# Altium PCB MONOPLACA FINAL.PcbDoc
Units mm, origin at the board's own origin, x right, y up, seen from the top; angles counter-clockwise.
Board outline 200 x 90 mm, 2 copper layers (Top Layer, Bottom Layer); 47 components, 35 nets, 158 pads, 7 vias.
Unrouted connection lines stored in the file: 19.
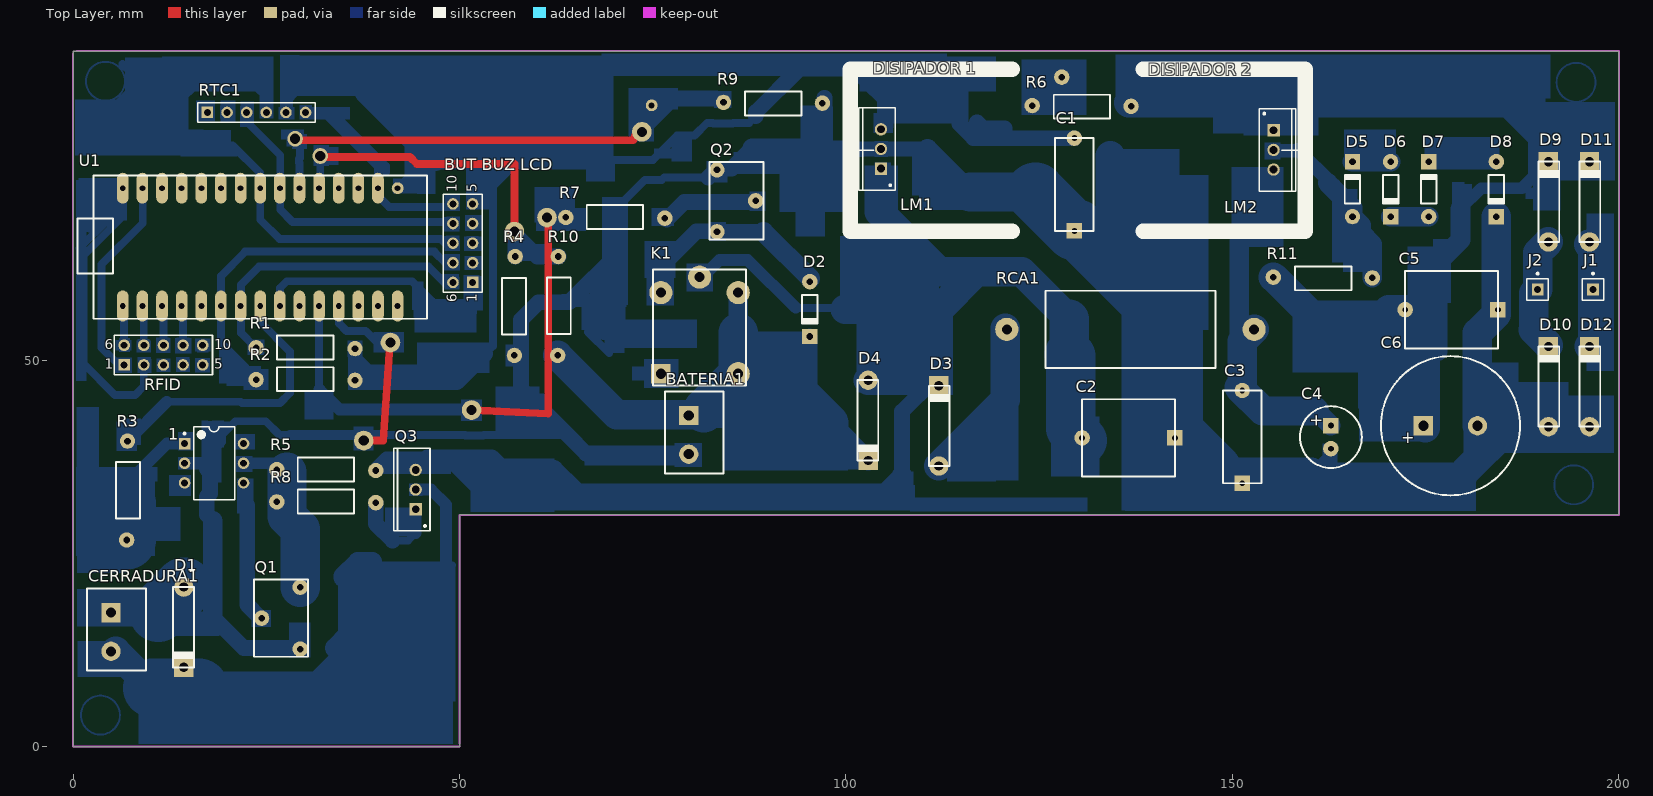
[diagram p0: Top Layer view]
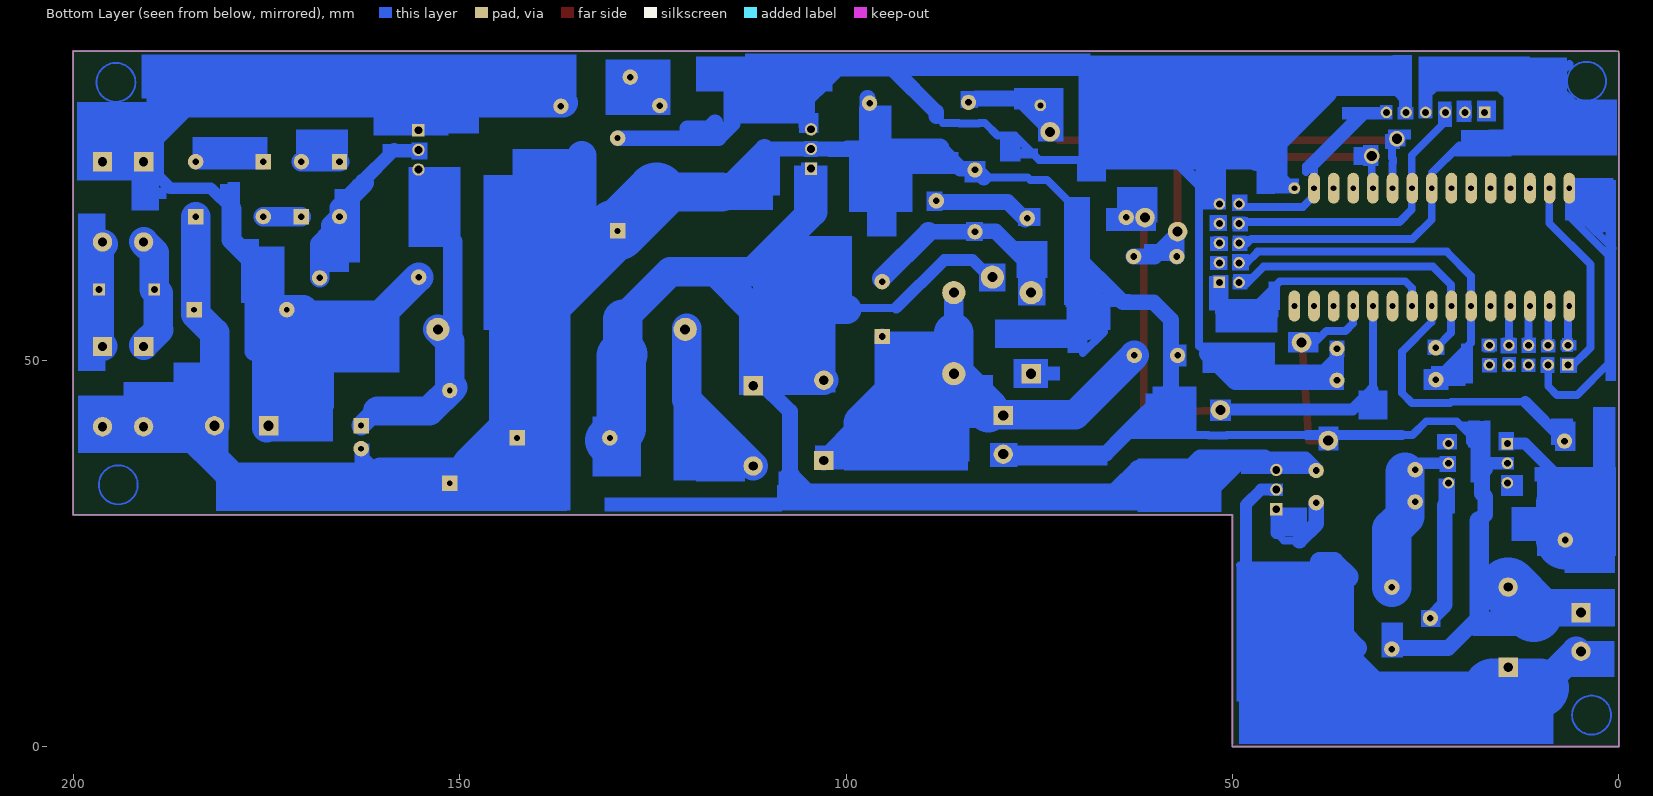
[diagram p1: Bottom Layer view, seen from below]
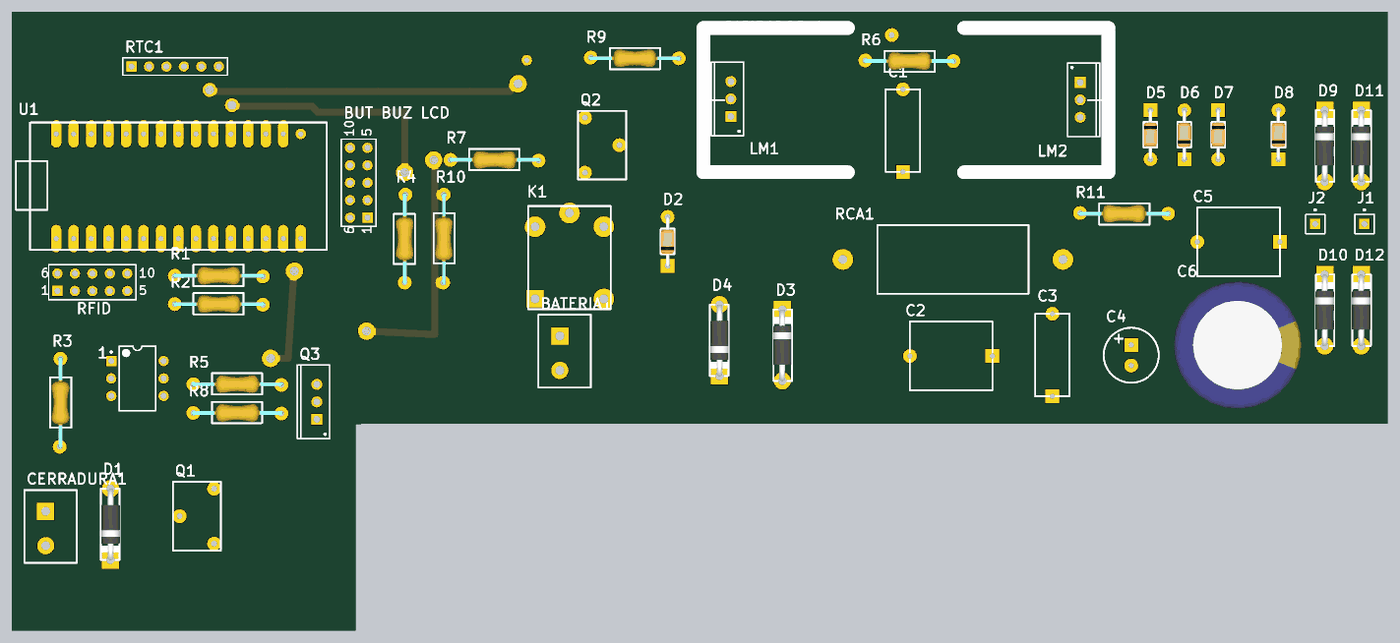
[diagram p2: 3D render of the assembled board from above, using the file's embedded part models]

## Layer stack, top to bottom
Top Solder: solder mask 0.0102, Solder Resist, Dk 3.5
Top Layer: signal copper 0.0356
Dielectric 1: dielectric 0.32, FR-4, Dk 4.8
Bottom Layer: signal copper 0.0356
Bottom Solder: solder mask 0.0102, Solder Resist, Dk 3.5

## Board outline
0,0 50,0 50,30 200,30 200,90 0,90

## Design rules (kind name [scope] priority, off if disabled: settings)
Clearance [All         - WithinRoom('Room1') vs All              - WithinRoom('Room1')] p1: gap=1.524 ignorepadtopadclearanceinfootprint=FALSE except(1.016: Arc-Arc Arc-Track Track-Track)
PolygonConnect [All] p1: connectstyle=Relief reliefconductorwidth=0.254 reliefentries=4 polygonreliefangle="90 Angle" airgapwidth=0.254
RoomDefinition Room1 [InComponentClass('Components Class -1')] p1: confinementstyle=ConfineIn formatcopy=TRUE lockcomponents=FALSE outline 0.61,89.611 64.541,89.611 64.541,41.732 0.61,41.732
RoutingVias [All] p1: holewidth=0.711 width=1.27 viastyle="Through Hole" minholewidth=0.711 minwidth=1.27 maxholewidth=0.711 maxwidth=1.27
SolderMaskExpansion [All] p1: expansion=0.102
Width [All] p1: maxlimit=12.7 minlimit=1.016 preferedwidth=1.016
30 further rules are at their usual default settings.

## Components (designator, comment, footprint, x,y, rotation, side; value= is the part's Value field where it differs from the comment)
1 "4N25" DIP-6 18.237,36.678 r0 top
BATERIA1 "Header 2" "Bornera 2 pin" 84.154,45.95 r270 top
"BUT BUZ LCD" "Header 5X2A" HDR2X5_CEN 51.689,60.071 r90 top
C1 "Cap" "CAP 5x12 mm" 129.54,66.74 r90 top value="0.1 uf"
C2 "Cap" "CAP 12x10 mm" 142.556,39.954 r180 top value="0.47 uf"
C3 "Cap" "CAP 5x12 mm" 151.271,34.087 r90 top value="0.1 uf"
C4 "Cap Pol1" "CAP POL 3 - 8 mm" 162.738,41.557 r90 top value="220 uf"
C5 "Cap" "CAP 12x10 mm" 184.353,56.54 r180 top value="0.47 uf"
C6 "Cap Pol1" "CAP POL 18x7 mm" 178.201,41.529 r180 top value="2200 uf"
CERRADURA1 "Header 2" "Bornera 2 pin" 9.402,20.444 r270 top
D1 "1N5819" DO-41 14.326,20.65 r270 top
D2 "IN4148" DO-35 95.326,60.173 r270 top
D3 "1N5819" DO-41 112.014,36.322 r90 top
D4 "1N4007" DO-41 102.87,47.422 r270 top
D5 "Diode 1N914" DO-35 165.532,68.592 r90 top
D6 "Diode 1N914" DO-35 170.459,75.692 r270 top
D7 "Diode 1N914" DO-35 175.387,68.592 r90 top
D8 "Diode 1N4148" DO-35 184.15,75.692 r270 top
D9 "IN4007" DO-41 190.881,65.307 r90 top
D10 "IN4007" DO-41 190.881,41.406 r90 top
D11 "IN4007" DO-41 196.19,65.307 r90 top
D12 "IN4007" DO-41 196.19,41.406 r90 top
"DISIPADOR 1" "DISIPADOR 20 °C/W" "DISIPADOR 20 C°/W" 121.539,87.675 r270 top
"DISIPADOR 2" "DISIPADOR 20 °C/W" "DISIPADOR 20 C°/W" 138.43,66.675 r90 top
J1 "trafo 19V" PIN1 196.647,59.157 r0 top
J2 "trafo 19 v" PIN1 189.484,59.157 r0 top
K1 "Relay" RELE 75.051,46.757 r90 top
LM1 "LM7805" TO-220AB 104.521,77.343 r90 top
LM2 "LM7812" TO-220AB 155.321,77.216 r270 top
Q1 "BC548" TO-92-MOD 24.384,16.637 r90 top
Q2 "BC548" TO-92-MOD 88.312,70.625 r270 top
Q3 "TIP32" TO-220AB 44.323,33.274 r90 top
R1 "Res1" "RESISTENCIA 0.25 W" 30.074,51.613 r0 top value=1K
R2 "Res1" "RESISTENCIA 0.25 W" 30.074,47.498 r0 top value=1K
R3 "Res1" "RESISTENCIA 0.25 W" 7.036,33.147 r270 top value=1K
R4 "Res1" "RESISTENCIA 0.25 W" 57.099,57.023 r90 top value=1K
R5 "Res1" "RESISTENCIA 0.25 W" 32.766,35.839 r0 top value=10K
R6 "Res1" "RESISTENCIA 0.25 W" 130.48,82.855 r180 top value=10K
R7 "Res1" "RESISTENCIA 0.25 W" 70.155,68.478 r0 top value=10K
R8 "Res1" "RESISTENCIA 0.25 W" 32.766,31.672 r0 top value=1K
R9 "Res1" "RESISTENCIA 0.25 W" 90.551,83.261 r180 top value=1K
R10 "Res1" "RESISTENCIA 0.25 W" 62.789,57.023 r270 top value=10K
R11 "Res1" "RESISTENCIA 0.25 W" 161.696,60.655 r180 top value=1K
RCA1 "Res1" "RESISTENCIA 5W" 125.806,48.997 r90 top value=11
RFID "Header 5X2A" HDR2X5_CEN 6.604,49.403 r0 top
RTC1 "Header 6" HDR1X6 17.374,82.067 r0 top
U1 "Arduino Nano" "Arduino nano" 41.986,72.263 r270 top

## Footprints (in the part's own frame and the unit in brackets; to place one, negate y for a bottom-side part, rotate by r counter-clockwise, add the part's x,y. Pads: shape width x height; smd on the part's side, far side on the other; paste and mask are expansions set on the pad)
"Arduino nano" [mm]
  round 1.524 hole 0.762: 01(0,0)
  oval 4x1.5 hole 0.762: 02(0,-2.54) 03(0,-5.08) 04(0,-7.62) 05(0,-10.16) 06(0,-12.7) 07(0,-15.24) 08(0,-17.78) 09(0,-20.32) 10(0,-22.86) 11(0,-25.4) 12(0,-27.94) 13(0,-30.48) 14(0,-33.02) 15(0,-35.56) 16(15.24,-35.56) 17(15.24,-33.02) 18(15.24,-30.48) 19(15.24,-27.94) 20(15.24,-25.4) 21(15.24,-22.86) 22(15.24,-20.32) 23(15.24,-17.78) 24(15.24,-15.24) 25(15.24,-12.7) 26(15.24,-10.16) 27(15.24,-7.62) 28(15.24,-5.08) 29(15.24,-2.54) 30(15.24,0)
  silkscreen extent -1.65,-41.4 16.89,3.81
"Bornera 2 pin" [mm]
  rect 2.5x2.5 hole 1.3: 1(3.1,-4.5)
  round 2.5 hole 1.3: 2(8.1,-4.5)
  silkscreen extent 0,-7.6 10.6,0
"CAP 5x12 mm" [mm]
  rect 2x2 hole 0.762: 1(0,0)
  round 2 hole 0.762: 2(12,0)
  silkscreen extent 0,-2.5 12,2.5
"CAP 12x10 mm" [mm]
  rect 2x2 hole 0.762: 1(0,0)
  round 2 hole 0.762: 2(12,0)
  silkscreen extent 0,-5 12,5
"CAP POL 3 - 8 mm" [mm]
  rect 2x2 hole 0.762: 1(0,0)
  round 2 hole 0.762: 2(-3,0)
  silkscreen extent -5.5,-4 2.5,4
"CAP POL 18x7 mm" [mm]
  rect 2.5x2.5 hole 1.3: 1(3.5,0)
  round 2.5 hole 1.3: 2(-3.5,0)
  silkscreen extent -9,-9 9,9, body extent -9.25,-9.25 9.25,9.25, height 37.5
DIP-6 [mm] "DIP; 6 Leads; Row Spacing 7.62 mm; Pitch 2.54 mm"
  rect 1.5x1.5 hole 0.9: 1(-3.81,2.54)
  round 1.5 hole 0.9: 2(-3.81,0) 3(-3.81,-2.54) 4(3.81,-2.54) 5(3.81,0) 6(3.81,2.54)
  silkscreen extent -3.93,-4.7 2.65,4.7, body extent -3.55,-4.7 3.55,4.7, height 5.46
"DISIPADOR 20 C°/W" [mm]
  silkscreen extent 0,-21 21,0
DO-35 [mm]
  round 2 hole 0.85: 1(0,0)
  rect 2x2 hole 0.85: 2(7.1,0)
  silkscreen extent 1.7,-1 5.4,1, body extent -0.15,-1 7.35,1, height 1
DO-41 [mm]
  round 2.5 hole 1.2: 1(0,0)
  rect 2.5x2.5 hole 1.2: 2(10.385,0)
  silkscreen extent 0,-1.4 10.38,1.3, body extent 0,-1.35 10.38,1.35, height 2.83
HDR1X6 [mm] "Connector; Header; 6 Position"
  rect 1.5x1.5 hole 0.9: 1(0,0)
  round 1.5 hole 0.9: 2(2.54,0) 3(5.08,0) 4(7.62,0) 5(10.16,0) 6(12.7,0)
  silkscreen extent -1.27,-1.27 13.97,1.27
HDR2X5_CEN [mm] "Connector; Header; 5x2 Position"
  rect 1.5x1.5 hole 0.9: 1(0,0)
  round 1.5 hole 0.9: 2(2.54,0) 3(5.08,0) 4(7.62,0) 5(10.16,0) 6(0,2.54) 7(2.54,2.54) 8(5.08,2.54) 9(7.62,2.54) 10(10.16,2.54)
  silkscreen extent -1.27,-1.27 11.43,3.81
PIN1 [mm] "Connector; Plug"
  rect 1.5x1.5 hole 0.9: 1(0,0)
  silkscreen extent -1.4,-1.4 1.4,2.17
RELE [mm]
  rect 2.5x2.5 hole 1.3: 1(1.5,-1)
  round 3 hole 1.3: 2(1.5,-11) 3(12,-1) 4(12,-11) 5(14,-6)
  silkscreen extent 0,-12 15,0
"RESISTENCIA 0.25 W" [mm]
  round 2 hole 0.85: 1(-6.4,0) 2(6.4,-0.1)
  silkscreen extent -3.7,-1.5 3.6,1.6, body extent -6.63,-1.27 6.63,1.27, height 2.54
"RESISTENCIA 5W" [mm]
  round 3 hole 1.3: 1(5,5) 2(5,-27)
  silkscreen extent 0,-22 10,0
TO-92-MOD [mm]
  round 2 hole 0.85: 1(4,-5) 2(0,0) 3(-4,-5)
  silkscreen extent -5,-6 5,1
TO-220AB [mm] "TO, Thru-Hole, Vertical, Heatsink Mounted; 3 In-Line Leads; Pitch 2.54 mm"
  rect 1.6x1.6 hole 1: 1(-2.54,0)
  round 1.6 hole 1: 2(0,0) 3(2.54,0)
  silkscreen extent -5.35,-1.85 5.35,2.85, body extent -5.4,-1.9 5.4,2.9, height 19.3

## Part data
1: library part Optoisolator1, "4-Pin Phototransistor Optocoupler", DatasheetVersion=Nov-2003, LatestRevisionDate=04-Mar-2005, LatestRevisionNote="Sch pins 3 & 4 Swapped.", PackageReference=DIP-4, Published=24-Mar-1999, Publisher="Altium Limited"
BATERIA1 CERRADURA1: "Header, 2-Pin", LatestRevisionDate=17-Jul-2002, LatestRevisionNote="Re-released for DXP Platform.", Publisher="Altium Limited"
"BUT BUZ LCD" RFID: "Header, 5-Pin, Dual row", LatestRevisionDate=17-Jul-2002, LatestRevisionNote="Re-released for DXP Platform.", Publisher="Altium Limited"
C1 C2 C3 C5: "Capacitor", LatestRevisionDate=17-Jul-2002, LatestRevisionNote="Re-released for DXP Platform.", PackageDescription="Radial Cap, Thru-Hole; 2 Leads; 0.3 in Pin Spacing", PackageReference=RAD-0.3, Published=8-Jun-2000, Publisher="Altium Limited"
C4 C6: "Polarized Capacitor (Radial)", LatestRevisionDate=17-Jul-2002, LatestRevisionNote="Re-released for DXP Platform.", PackageDescription="Polarized Capacitor (Radial); 2 Leads", PackageReference=RB7.6-15, Published=8-Jun-2000, Publisher="Altium Limited"
D1 D3: library part "D Schottky", "Schottky Diode", Code_JEDEC=DO-214-AA, LatestRevisionDate=17-Jul-2002, LatestRevisionNote="Re-released for DXP Platform.", PackageDescription="DO-214-AA/SMB; 2 C-Bend Leads; Body 5.3 x 3.6 mm, inc. leads (LxW)", PackageReference=SMB, Published=8-Jun-2000, Publisher="Altium Limited"
D2 D4 D8 D9 D10 D11 D12: library part "Diode 1N914", "High Conductance Fast Diode", Code_JEDEC=DO-204-AH, ComponentLink1Description="Manufacturer Link", ComponentLink1URL=http://www.fairchildsemi.com/, ComponentLink2Description=Datasheet, ComponentLink2URL=http://www.fairchildsemi.com/ds/1N%2F1N4448.pdf, DatasheetVersion=1997, LatestRevisionDate=17-Jul-2002, LatestRevisionNote="Re-released for DXP Platform.", PackageDescription="Diode, Axial; Body 3.8 x 1.9 mm (LxDia. max), Lead Dia. 0.53 mm (max)", PackageReference=DO-35, Published=8-Jun-2000, Publisher="Altium Limited"
D5 D6 D7: "High Conductance Fast Diode", Code_JEDEC=DO-204-AH, ComponentLink1Description="Manufacturer Link", ComponentLink1URL=http://www.fairchildsemi.com/, ComponentLink2Description=Datasheet, ComponentLink2URL=http://www.fairchildsemi.com/ds/1N%2F1N4448.pdf, DatasheetVersion=1997, LatestRevisionDate=17-Jul-2002, LatestRevisionNote="Re-released for DXP Platform.", PackageDescription="Diode, Axial; Body 3.8 x 1.9 mm (LxDia. max), Lead Dia. 0.53 mm (max)", PackageReference=DO-35, Published=8-Jun-2000, Publisher="Altium Limited"
"DISIPADOR 1" "DISIPADOR 2" J1 J2: library part Socket, "Socket", LatestRevisionDate=17-Jul-2002, LatestRevisionNote="Re-released for DXP Platform.", Publisher="Altium Limited"
K1: library part Relay-SPST, "Single-Pole Single-Throw Relay", LatestRevisionDate=17-Jul-2002, LatestRevisionNote="Re-released for DXP Platform.", PackageReference=MODULE4, Published=24-Mar-1999, Publisher="Altium Limited"
LM1 LM2: library part "Volt Reg", "Voltage Regulator", LatestRevisionDate=29-May-2009, LatestRevisionNote="IPC-7351 Footprint Added.", PackageDescription="3-Pin Transistor Outline Package 2.54 mm Pitch, 15.1 mm Lead Span", PackageReference=D2PAK, Published=24-Mar-1999, Publisher="Altium Limited"
Q1: library part 2N3904, "NPN General Purpose Amplifier", ComponentLink1Description="Manufacturer Link", ComponentLink1URL=http://www.fairchildsemi.com/, ComponentLink2Description=Datasheet, ComponentLink2URL=http://www.fairchildsemi.com/ds/2N%2F2N3904.pdf, DatasheetVersion=1997, LatestRevisionDate=15-Jan-2003, LatestRevisionNote="PCB Footprint 'BCY-W3/D4.7' replaced", PackageDescription="TO, Flat Index; 3 In-Line, Axial Leads; Body Dia. 4.5mm; Leads 0.51 x 0.48 mm (max)", PackageReference=TO-92A, PackageVersion=Sep-1998, Published=8-Jun-2000, Publisher="Altium Limited"
Q2: library part NPN, "NPN Bipolar Transistor", Code_JEDEC=TO-226-AA, LatestRevisionDate=17-Jul-2002, LatestRevisionNote="Re-released for DXP Platform.", PackageDescription="TO, Flat Index; 3 In-Line, Axial Leads; Body Dia. 4.8mm; Leads 0.55 x 0.51 mm (max)", PackageReference=TO-226-AA, Published=8-Jun-2000, Publisher="Altium Limited"
Q3: library part 2N3906, "PNP General Purpose Amplifier", ComponentLink1Description="Manufacturer Link", ComponentLink1URL=http://www.fairchildsemi.com/, ComponentLink2Description=Datasheet, ComponentLink2URL=http://www.fairchildsemi.com/ds/2N%2F2N3906.pdf, DatasheetVersion=1997, LatestRevisionDate=15-Jan-2003, LatestRevisionNote="PCB Footprint 'BCY-W3/D4.7' replaced", PackageDescription="TO, Flat Index; 3 In-Line, Axial Leads; Body Dia. 4.5mm; Leads 0.51 x 0.48 mm (max)", PackageReference=TO-92A, PackageVersion=Sep-1998, Published=8-Jun-2000, Publisher="Altium Limited"
R1 R2 R3 R4 R5 R6 R7 R8 R9 R10 R11 RCA1: "Resistor", LatestRevisionDate=17-Jul-2002, LatestRevisionNote="Re-released for DXP Platform.", PackageDescription="Axial Device, Thru-Hole; 2 Leads; 0.3 in Pin Spacing", PackageReference=AXIAL-0.3, Published=8-Jun-2000, Publisher="Altium Limited"
RTC1: "Header, 6-Pin", LatestRevisionDate=17-Jul-2002, LatestRevisionNote="Re-released for DXP Platform.", Publisher="Altium Limited"
U1: library part Component_1

## Free pads (board coordinates)
  round 2.032 hole 1.3: 2(28.727,78.664) 3(31.979,76.429)
  round 2.54 hole 1.3: 4(73.584,79.563) 5(57.099,66.65) 6(61.316,68.453) 7(51.562,43.561) 8(41.061,52.291) 9(37.605,39.612)
  round 1.524 hole 0.762: 10(74.854,82.982)
  round 2 hole 0.85: 11(127.914,86.639)

## Via types
v1: diameter 1.27, hole 0.711, Top Layer to Bottom Layer, 7 vias

## Nets (pads, with @x,y where several pads share a name; then routed paths per layer and width w, separated by ;. In a path a pad name is that pad's centre, name@x,y a point inside that pad or via, vN(x,y) a via of type N, cw(c..) or ccw(c..) an arc to the next point about the centre after c; other vN are vias at no path point)
5V: "BUT BUZ LCD.8" C1.2 LM1.3 R1.2 R2.2 RTC1.5 | length 175.2
  Bottom Layer w0.508: 110.541,81.28 112.172,81.28
  Bottom Layer w1.016: RTC1.5 27.534,83.388 29.083,84.938 ; 51.689,70.231 54.305,72.847 54.305,51.816 53.34,50.851 ; 68.453,75.921 75.006,75.921 78.156,79.07 80.391,79.07 82.042,80.721 82.733,80.721 82.819,80.636 85.331,80.636 85.416,80.721 87.478,80.721 88.341,81.585 ; LM1.3 106.756,82.118 ; C1.2@129.743,79.172 C1.2@129.921,78.994
  Bottom Layer w1.524: 29.083,84.938 38.245,84.938 ; 54.305,72.847 57.379,75.921
  Bottom Layer w1.778: R2.2 36.474,50.244 ; R1.2 36.474,50.244 ; 39.573,47.144 36.474,50.244 ; 106.756,82.118 110.541,82.118
  Bottom Layer w2.032: 39.573,47.144 49.633,47.144 53.34,50.851 ; 88.341,81.585 88.341,82.118 93.955,87.732 101.143,87.732 106.756,82.118 ; 114.656,80.62 116.484,78.791 116.484,78.74 C1.2 ; 116.942,80.797 117.754,79.985 120.548,79.985
  Bottom Layer w2.54: 46.794,76.388 47.262,75.921 57.379,75.921 68.453,75.921
  Bottom Layer w3.81: 38.245,84.938 46.794,76.388
"13,8 V": BATERIA1.1 D2.2 D4.2 K1.2 K1.4 R10.2 | length 71.3
  Bottom Layer w1.016: 89.662,49.962 89.662,51.13 ; D4.2@102.26,38.075 D4.2@103.251,37.084
  Bottom Layer w2.032: 86.051,53.572 86.551,53.073 ; 95.11,44.514 95.326,44.729 D2.2
  Bottom Layer w2.54: 86.051,53.572 K1.4@86.051,58.757 ; 97.765,41.859 98.048,41.859 D4.2
  Bottom Layer w3.81: R10.2 70.335,42.977 81.595,42.977
  Bottom Layer w5.08: 81.595,43.164 81.595,43.8 K1.2 86.051,53.572 ; 88.709,50.915 89.662,49.962 95.11,44.514 97.765,41.859
"14,5 V": C2.2 D3.2 D4.1 K1.5 LM1.1 Q3.3 R5.2 | length 204.2
  Bottom Layer w1.016: Q3.3 Q3.3@44.323,35.941 ; 66.7,32.817 66.7,32.868 ; K1.5 K1.5@81.407,60.757 ; 93.485,56.781 99.734,56.781 99.924,56.591 ; 104.318,69.215 104.521,69.418 LM1.1
  Bottom Layer w1.524: R5.2 39.166,36.095 40.511,37.44 45.822,37.44 Q3.3@44.323,35.941 ; K1.5@81.407,60.757 83.617,62.967 87.3,62.967 93.485,56.781
  Bottom Layer w2.032: 45.822,37.44 54.153,37.44 58.776,32.817 ; 106.909,46.914 107.417,47.422 ; 107.239,35.128 107.239,43.361 D3.2@111.299,47.422
  Bottom Layer w2.54: 58.776,32.817 66.7,32.817 105.101,32.817 107.239,34.954 107.239,35.128
  Bottom Layer w3.81: 99.924,56.591 112.039,56.591 ; 104.318,69.215 112.065,61.468 116.916,61.468 ; D3.2@111.299,47.422 107.417,47.422 D4.1 112.039,56.591 ; 128.88,55.321 122.733,61.468 116.916,61.468 ; 112.039,56.591 116.916,61.468
  Bottom Layer w5.08: 128.88,50.749 128.88,55.321
  Bottom Layer w6.35: 128.88,50.749 129.083,50.546 129.083,41.162 C2.2@130.621,39.624
"14,8 V": C3.2 C4.1 LM2.3 RCA1.2 | length 48.1
  Bottom Layer w1.016: 150.876,65.354 150.774,65.456 155.321,70.002 155.321,73.876
  Bottom Layer w2.54: 150.876,50.19 150.876,65.354 ; 160.604,43.434 160.861,43.434 C4.1
  Bottom Layer w3.81: C3.2@150.876,46.482 153.924,43.434 160.604,43.434 ; C3.2 151.271,52.462 RCA1.2
GND: 1.2 "BUT BUZ LCD.5" BATERIA1.2 C1.1 C2.1 C3.1 C4.2 C5.1 C6.2 CERRADURA1.1 D1.1 D8.2 D10.1 D12.1 LM1.2 pad.8 pad.9 Q1.3 Q2.3 R4.1 R9.1 RTC1.6 U1.27 | length 429.2
  Top Layer w1.016: v1(37.605,39.612) 40.132,39.612 40.967,51.861 v1(41.061,52.291)
  Bottom Layer w0: 39.497,71.476 39.567,72.64
  Bottom Layer w0.254: 140.719,62.332 ccw(c138.201,62.332) 140.719,62.332
  Bottom Layer w1.016: D1.1@13.716,21.082 D1.1@13.97,21.082 ; 16.54,36.678 19.265,39.403 19.265,40.37 21.008,42.113 24.917,42.113 26.695,40.335 28.067,40.335 ; 17.272,29.997 18.059,29.21 ; 18.059,16.408 18.25,16.599 ; 34.112,81.483 40.462,75.133 40.462,74.346 ; U1.27@34.417,57.404 34.417,54.762 35.382,53.797 37.846,53.797 39.352,52.291 v1(41.061,52.291) ; 40.361,40.335 50.709,40.335 50.76,40.284 53.075,40.284 53.126,40.335 63.983,40.335 ; 68.631,53.162 68.123,53.67 66.624,53.67 69.367,50.927 ; 70.764,70.104 74.001,73.34 76.161,73.34 76.481,73.66 82.17,73.66 ; 99.847,77.445 99.949,77.343 LM1.2 110.541,77.343 ; C1.1@129.921,66.994 133.056,66.994 134.163,65.888 ; 160.198,35.535 162.941,38.278 C4.2@162.941,38.656 ; D8.2@183.502,68.592 D8.2 ; C5.1@184.212,56.044 C5.1@184.212,56.388
  Bottom Layer w1.27: 28.067,40.335 40.361,40.335
  Bottom Layer w1.524: 1.2 16.54,36.678 17.272,35.946
  Bottom Layer w2.032: CERRADURA1.1 11.02,17.344 ; 17.272,29.997 17.272,32.33 17.717,32.775 17.717,35.5 17.272,35.946 ; 18.25,16.599 22.085,12.764 Q1.3@29.13,12.764 ; 70.764,70.104 70.764,64.084 64.186,57.506 60.223,57.506 57.963,55.245 57.963,46.355 63.983,40.335 66.37,37.948 BATERIA1.2@79.096,37.948 ; 82.17,73.66 83.288,74.778 85.192,74.778 87.859,77.445 ; R9.1@97.205,83.974 97.205,80.111 94.539,77.445 99.847,77.445
  Bottom Layer w2.54: 18.059,16.408 18.059,29.21 ; 87.859,77.445 94.539,77.445 ; 110.541,77.343 116.103,71.78 ; 160.198,35.535 180.035,35.535
  Bottom Layer w3.81: 134.163,65.888 134.163,76.479 ; 139.471,43.039 C2.1 ; 147.498,35.535 160.198,35.535 ; 180.035,35.535 185.699,41.199 ; D8.2@184.15,68.58 184.15,55.982 181.701,53.533 C6.2 181.825,41.406 D10.1 ; D10.1@191.059,41.406 D12.1
  Bottom Layer w5.08: 116.103,71.78 124.5,71.78
  Bottom Layer w7.62: 11.02,17.344 D1.1 ; 124.5,71.78 C1.1 ; C1.1@129.921,66.994 139.471,57.444 139.471,43.039 ; C2.1@142.621,40.411 147.498,35.535
Net1_1: 1.1 R3.2 | length 17.2
  Bottom Layer w1.016: 6.936,31.472 6.936,33.098 ; 1.1@14.427,38.964 1.1
  Bottom Layer w1.524: 6.936,33.098 6.936,34.012 12.141,39.218 1.1
  Bottom Layer w7.62: R3.2 6.936,31.472
Net1_3: 1.4 Q1.2 | length 18.2
  Bottom Layer w1.524: 1.4 22.047,31.725 22.53,31.242
  Bottom Layer w2.032: 22.53,31.242 22.53,18.364 Q1.2@24.13,16.764
Net1_4: 1.5 Q1.1 R5.1 R8.1 | length 21.7
  Bottom Layer w1.016: R5.1@26.556,36.678 27.686,35.548
  Bottom Layer w1.524: 1.5 R5.1@26.556,36.678
  Bottom Layer w5.08: 27.686,35.548 27.686,29.82 29.384,28.122 Q1.1
"NetBUT BUZ LCD_1": "BUT BUZ LCD.1" R1.1 U1.20 | length 38
  Bottom Layer w1.016: R1.1@23.445,51.816 21.717,53.544 21.717,59.766 24.028,62.078 ; 24.028,62.141 45.999,62.141 ; 45.999,62.078 48.133,59.944 49.022,59.944 49.149,60.071
"NetBUT BUZ LCD_2": "BUT BUZ LCD.2" R2.1 U1.25 | length 49.9
  Bottom Layer w1.016: 20.422,49.733 20.777,49.733 21.336,49.174 ; 21.336,48.539 21.336,49.174 ; 22.225,63.983 19.152,60.909 19.152,52.222 21.336,50.038 ; 22.225,64.059 46.761,64.059 ; R2.1@23.445,47.244 23.445,47.929 21.336,50.038 ; 46.761,63.983 48.133,62.611 49.149,62.611 ; 21.336,49.174 21.336,50.038
"NetBUT BUZ LCD_3": "BUT BUZ LCD.3" U1.24 | length 33.4
  Bottom Layer w1.016: U1.24 26.746,59.334 27.635,60.223 43.84,60.223 48.336,55.728 50.444,55.728 51.689,56.972 51.689,60.071 ; U1.24@26.797,57.404 U1.24@26.797,57.658
NetC5_2: C5.2 C6.1 D9.2 D11.2 LM2.1 R6.1 R11.2 | length 154.5
  Bottom Layer w0.254: 196.98,85.954 ccw(c194.462,85.954) 196.98,85.954
  Bottom Layer w1.016: R11.2@155.017,60.679 R11.2@155.119,60.577 ; LM2.1 155.321,81.585 157.048,83.312 157.836,83.312 157.861,83.337
  Bottom Layer w1.524: 179.502,69.571 182.194,72.263 187.452,72.263 D9.2
  Bottom Layer w2.54: 176.53,51.15 176.53,62.611 179.502,65.583 179.502,69.571
  Bottom Layer w3.048: 159.825,56.226 170.245,56.226
  Bottom Layer w3.81: R6.1@136.575,83.312 157.048,83.312 ; R11.2 159.825,56.226 ; 157.861,83.337 185.75,83.337 193.396,75.692 ; 170.245,56.226 170.245,56.54 C5.2 174.935,53.959 C6.1@174.935,41.275 ; D9.2 193.396,75.692 ; D11.2@195.961,75.692 193.396,75.692
NetCERRADURA1_1: CERRADURA1.2 D1.2 Q3.2 | length 68.1
  Bottom Layer w1.016: D1.2@13.716,10.697 13.716,10.16 16.281,7.595
  Bottom Layer w1.524: Q3.2 46.304,33.274 48.26,31.318 48.26,22.504
  Bottom Layer w2.54: CERRADURA1.2 CERRADURA1.2@5.516,12.344 ; 43.307,17.551 47.422,21.666 47.422,21.717
  Bottom Layer w3.81: CERRADURA1.2@5.516,12.344 10.265,7.595 ; 16.281,7.595 33.35,7.595
  Bottom Layer w6.35: 33.35,7.595 43.307,17.551
  Bottom Layer w7.62: 10.265,7.595 16.281,7.595
NetD2_1: D2.1 K1.3 Q2.1 | length 27.6
  Bottom Layer w1.016: Q2.1@83.693,66.7 Q2.1@83.693,67.183
  Bottom Layer w2.032: K1.3@76.051,58.757 76.051,62.107 80.645,66.7 Q2.1@83.693,66.7 ; Q2.1@83.693,66.624 89.332,66.624
  Bottom Layer w2.54: 89.332,66.624 D2.1@95.377,60.579
NetD3_1: D3.1 RCA1.1 | length 21.4
  Bottom Layer w3.81: D3.1 120.603,44.911 RCA1.1@120.603,54.149
NetD5_1: D5.1 LM2.2 R11.1 | length 24.5
  Bottom Layer w1.016: LM2.2 158.42,77.216 158.445,77.241 ; 162.89,72.382 162.89,72.796
  Bottom Layer w1.778: 158.445,77.241 162.89,72.796
  Bottom Layer w2.54: 162.315,72.958 162.89,72.382 165.532,69.741 D5.1 166.665,67.458 166.665,66.435 168.096,65.004 R11.1
NetD5_2: D5.2 D6.1 | length 4.9
  Bottom Layer w2.54: D5.2 D6.1
NetD6_2: D6.2 D7.1 | length 4.9
  Bottom Layer w2.54: D6.2 D7.1
NetD7_2: D7.2 D8.1 | length 8.8
  Bottom Layer w2.032: D7.2 D8.1
NetD9_1: D9.1 D10.2 J2.1 | length 15
  Bottom Layer w3.81: D10.2@190.881,51.968 188.921,53.928 188.976,53.983 188.976,58.649 J2.1 189.484,63.91 D9.1
NetD11_1: D11.1 D12.2 J1.1 | length 13.6
  Bottom Layer w3.81: D11.1@196.113,65.002 196.647,64.469 J1.1 196.647,52.248 D12.2
NetQ2_2: Q2.2 R7.2 | length 13.1
  Bottom Layer w1.016: Q2.2@87.995,70.485 Q2.2@88.693,71.183
  Bottom Layer w2.032: R7.2@76.81,68.224 79.07,70.485 Q2.2@87.995,70.485
NetQ3_2: Q3.1 R8.2 | length 12.3
  Bottom Layer w1.016: 41.326,26.67 43.358,26.67 43.358,26.695 44.323,27.661
  Bottom Layer w1.524: 44.323,27.661 Q3.1
  Bottom Layer w2.032: R8.2 39.166,28.83 41.326,26.67
NetR3_1: R3.1 U1.23 | length 37.9
  Bottom Layer w1.016: 12.117,44.628 21.697,44.628 21.859,44.466 26.762,44.466 28.042,45.745 28.042,51.13 24.206,54.966 U1.23 ; U1.23@24.257,56.083 U1.23@24.257,57.404
  Bottom Layer w1.524: R3.1 12.117,44.628
NetR4_2: pad.3 pad.5 R4.2 R10.1 | length 48.5
  Top Layer w1.016: pad.3 32.36,76.429 32.493,76.295 40.395,76.295 43.578,76.295 44.46,75.413 57.099,75.413 v1(57.099,66.65) pad.5@57.125,66.675
  Bottom Layer w1.016: 31.826,72.263 31.979,72.415 pad.3
  Bottom Layer w2.032: pad.5@56.966,66.516 pad.5@57.199,66.283 ; R4.2 pad.5@57.199,66.283 ; R10.1 60.059,63.423 pad.5@57.199,66.283
NetRFID_1: RFID.1 U1.18 | length 5.5
  Bottom Layer w1.016: U1.18@11.557,57.404 11.684,57.277 11.684,51.943
NetRFID_2: RFID.2 U1.19 | length 5.5
  Bottom Layer w1.016: U1.19@14.097,57.404 14.224,57.277 14.224,51.943
NetRFID_6: RFID.6 U1.14 | length 27.1
  Bottom Layer w1.016: 6.604,49.403 5.893,49.403 3.683,51.613 3.683,62.408 9.017,67.742 U1.14@9.017,72.644
NetRFID_7: RFID.7 U1.15 | length 46.2
  Bottom Layer w1.016: 0.787,64.491 4.648,68.351 ; U1.15@6.477,72.644 6.477,68.707 1.372,63.602 1.372,49.53 5.41,45.491 8.001,45.491 9.144,46.634 9.144,49.403
  Bottom Layer w2.032: 2.157,67.539 2.97,68.351 4.648,68.351
NetRFID_8: RFID.8 U1.16 | length 5.5
  Bottom Layer w1.016: U1.16@6.477,57.404 6.604,57.277 6.604,51.943
NetRFID_9: RFID.9 U1.17 | length 5.5
  Bottom Layer w1.016: U1.17@9.017,57.404 9.144,57.277 9.144,51.943
RELAY: pad.6 pad.7 R7.1 U1.26 | length 70.4
  Top Layer w1.016: v1(51.562,43.561) 61.468,43.078 61.468,68.453 v1(61.316,68.453)
  Bottom Layer w1.016: U1.26 31.826,46.253 31.877,46.203 ; pad.7@51.359,43.637 51.521,43.689 51.703,43.747 v1(51.562,43.561) ; R7.1@64.11,68.453 R7.1@64.212,68.351
  Bottom Layer w1.524: 31.877,46.203 34.442,43.637 pad.7@51.359,43.637
  Bottom Layer w2.032: v1(61.316,68.453) R7.1@64.11,68.453
SCL: "BUT BUZ LCD.9" RTC1.3 | length 37.5
  Bottom Layer w1.016: RTC1.3 22.454,80.874 26.797,76.53 26.797,69.494 28.397,67.894 48.946,67.894 49.149,67.691
SDA: "BUT BUZ LCD.10" RTC1.4 | length 66.9
  Bottom Layer w1.016: 5.334,82.779 7.264,84.709 ; 6.375,88.351 6.969,87.757 7.442,87.757 ; RTC1.4 24.994,84.099 23.724,85.369 15.57,85.369 14.148,83.947 14.148,79.781 16.129,77.8 20.625,77.8 24.206,74.219 24.206,68.199 26.721,65.684 47.574,65.684 48.184,65.075 48.26,65.151 49.149,65.151
"SENS 12V": pad.2 pad.4 pad.10 R6.2 R9.2 | length 61.7
  Top Layer w1.016: pad.2@28.727,78.461 72.481,78.461 72.995,79.724 73.023,79.792 v1(73.584,79.563)
  Bottom Layer w1.016: v1(28.727,78.664) 29.337,78.054 29.337,76.175 ; 29.337,72.644 29.413,72.72 ; v1(73.584,79.563) 73.433,79.775 pad.4@73.584,79.883 ; 83.203,83.871 83.305,83.769 84.1,83.769 R9.2@84.405,84.074
  Bottom Layer w2.032: pad.4@73.584,79.883 77.572,83.871 83.203,83.871
pads on no net: 1.3 1.6 "BUT BUZ LCD.4" "BUT BUZ LCD.6" "BUT BUZ LCD.7" K1.1 RFID.3 RFID.4 RFID.5 RFID.10 RTC1.1 RTC1.2 U1.01 U1.02 U1.03 U1.04 U1.05 U1.06 U1.07 U1.08 U1.09 U1.10 U1.11 U1.12 U1.13 U1.21 U1.22 U1.28 U1.29 U1.30
copper on no net: | length 148.3
  Bottom Layer w0.254: 6.048,4.089 ccw(c3.531,4.089) 6.048,4.089 ; 6.709,86.106 ccw(c4.191,86.106) 6.709,86.106 ; 196.675,33.884 ccw(c194.158,33.884) 196.675,33.884
  Bottom Layer w1.016: 29.286,72.263 29.286,75.159 29.286,75.54 29.235,75.59 29.235,76.073 29.337,76.175 ; 30.074,82.067 31.853,82.067 32.41,82.067 39.446,75.032 39.446,72.263 39.446,71.272 40.869,69.85 48.895,69.85 49.276,70.231 ; 31.826,76.276 31.979,76.429 ; 36.195,13.894 36.195,23.47 49.047,23.47 ; 42.037,72.263 41.986,72.263 43.688,73.965 43.967,73.965 43.891,74.041 ; 45.847,76.124 45.847,76.302
  Bottom Layer w2.032: 43.891,74.041 43.891,78.308
  Bottom Layer w2.54: 33.884,12.776 35.535,14.427 35.535,20.498 36.195,21.158 36.195,21.438 38.684,23.927 36.83,23.927 34.976,22.073 34.976,21.895 ; 49.276,37.008 53.137,33.147 64.846,33.147 62.179,35.814 60.63,35.814

## Keep-outs
Keep-Out Layer:
  lines w0.25: 0,89.637 0,0 50,0 ; 0.483,90 200,90 200,30 50,30 50,0.381

## Other copper
Bottom Layer:
  rectangle net "SENS 12V": 122.733,81.737 131.089,88.925
  rectangle net "14,5 V": 107.391,32.334 108.763,35.611
  rectangle net GND: 48.082,69.317 50.063,71.45
  rectangle net SCL: 48.006,66.675 50.013,68.529
  rectangle net "NetBUT BUZ LCD_2": 47.854,61.595 50.038,63.729
  rectangle net "NetBUT BUZ LCD_1": 47.6,60.452 49.911,61.138
  rectangle net "NetBUT BUZ LCD_3": 51.689,56.464 53.035,60.935
  rectangle net "NetBUT BUZ LCD_3": 50.521,56.566 52.603,61.011
  rectangle net "NetBUT BUZ LCD_2": 50.648,61.671 52.934,63.475
  rectangle net "NetBUT BUZ LCD_3": 50.571,64.135 52.883,65.989
  rectangle: 50.724,66.751 52.959,68.783
  rectangle: 8.357,49.174 10.109,50.444
  rectangle: 10.795,48.463 12.598,48.92
  rectangle: 13.31,49.708 15.062,50.419
  rectangle: 15.773,51.105 17.78,52.807
  rectangle: 13.208,50.902 15.316,52.908
  rectangle: 10.719,50.927 12.624,52.883
  rectangle: 8.179,51.029 10.084,52.527
  rectangle: 5.486,51.257 7.569,52.654
  rectangle: 5.41,48.362 7.645,50.368
  rectangle net GND: 29.261,81.28 30.912,83.058
  rectangle net 5V: 26.594,81.153 28.651,82.753
  rectangle: 15.875,80.899 18.339,83.591
  rectangle net SCL: 21.666,80.188 23.419,83.49
  rectangle: 19.101,80.823 20.98,83.642
  rectangle net GND: 98.171,76.276 102.337,78.334
  rectangle net GND: 102.337,76.352 109.931,78.334
  rectangle net NetD5_1: 154.178,75.997 156.21,78.207
  rectangle net NetD5_1: 154.838,75.997 156.21,78.207
  rectangle net NetD5_1: 154.178,76.225 159.969,78.003
  rectangle: 12.395,32.41 15.24,35.154
  rectangle net Net1_4: 21.057,35.535 23.19,37.617
  rectangle net Net1_1: 13.564,38.329 15.596,40.691
  rectangle net NetCERRADURA1_1: 8.458,0.356 49.174,9.728
  rectangle net NetCERRADURA1_1: 35.814,5.842 49.479,23.19
  rectangle net "14,5 V": 51.664,30.531 108.941,33.884
  rectangle net "14,5 V": 51.41,30.378 62.281,37.287
  rectangle net 5V: 43.459,74.905 69.926,89.459
  rectangle net 5V: 28.905,84.404 46.431,89.408
  rectangle net 5V: 41.453,82.194 45.491,85.979
  rectangle net 5V: 68.351,86.792 113.081,89.687
  rectangle net 5V: 101.727,84.785 119.431,89.281
  rectangle net 5V: 105.512,80.62 115.875,85.141
  rectangle net NetC5_2: 134.849,83.845 191.135,89.535
  rectangle net NetC5_2: 188.214,73.254 199.517,83.388
  rectangle net NetC5_2: 184.81,82.093 190.525,85.877
  rectangle net GND: 179.908,37.998 199.339,45.415
  rectangle net GND: 136.119,30.505 181.483,35.179
  rectangle net GND: 135.661,30.582 144.424,47.066
  rectangle net "14,5 V": 108.28,30.429 131.242,32.233
  rectangle net NetD3_1: 113.055,34.341 119.431,40.107
  rectangle net NetD3_1: 117.958,34.442 122.301,44.577
  rectangle net "13,8 V": 81.001,41.25 95.377,48.082
  rectangle net "13,8 V": 84.049,36.932 99.898,41.91
  rectangle net 5V: 44.475,46.965 50.851,52.324
  rectangle net 5V: 49.835,48.362 53.899,52.324
  rectangle net SDA: 11.481,84.785 24.486,89.332
  rectangle net "SENS 12V": 72.796,78.588 75.184,85.242
  rectangle net "SENS 12V": 72.796,82.474 78.232,85.242
  rectangle net GND: 63.195,56.921 71.603,58.598
  rectangle net GND: 68.453,57.125 71.78,71.12
  rectangle net GND: 66.802,58.598 69.85,61.087
  rectangle net 5V: 104.038,80.061 106.172,85.319
  rectangle net "14,5 V": 102.387,69.113 106.705,75.184
  rectangle net GND: 91.415,69.19 99.619,78.232
  rectangle net "14,5 V": 99.238,56.007 108.56,66.065
  rectangle net "14,5 V": 108.001,57.125 112.065,61.468
  rectangle net "14,5 V": 106.35,59.233 111.785,62.916
  rectangle net GND: 135.915,54.229 143.129,77.318
  rectangle net NetC5_2: 157.785,48.438 174.935,56.566
  rectangle net "14,8 V": 149.885,64.668 156.591,75.006
  rectangle net NetC5_2: 151.435,79.07 161.112,82.372
  rectangle net NetC5_2: 147.472,79.324 153.086,82.652
  rectangle net NetD11_1: 195.783,48.641 199.365,69.012
  rectangle net "14,5 V": 38.964,35.255 48.92,36.932
  rectangle net NetQ3_2: 40.335,27.254 44.475,30.937
  rectangle net Net1_1: 0.356,24.663 10.566,34.798
  rectangle net Net1_1: 0.483,22.454 7.061,25.222
  rectangle net Net1_1: 0.381,34.341 10.922,36.195
  rectangle net NetR3_1: 5.944,39.04 8.814,42.469
  rectangle net GND: 57.658,40.056 61.265,45.695
  rectangle net GND: 61.265,40.513 62.382,41.91
  rectangle net NetC5_2: 166.268,43.739 175.412,48.92
  rectangle net GND: 108.56,71.323 112.497,76.708
  rectangle net GND: 109.474,69.469 116.129,73.889
  rectangle net "14,5 V": 108.001,45.491 113.817,59.131
  rectangle net "14,5 V": 126.543,34.976 132.817,42.723
  rectangle net "14,5 V": 101.371,45.822 108.204,56.642
  rectangle net Net1_1: 0.457,34.976 3.353,43.942
  rectangle net GND: 0.533,15.545 8.814,20.422
  rectangle net NetCERRADURA1_1: 0.559,8.992 6.858,13.691
  rectangle net Net1_1: 8.89,26.594 13.868,31.013
  rectangle net RELAY: 59.69,67.818 64.948,72.415
  rectangle net GND: 65.786,53.899 71.501,58.496
  rectangle net GND: 68.732,50.927 71.323,55.093
  rectangle net GND: 70.383,51.587 80.721,55.27
  rectangle net GND: 67.539,52.781 69.571,54.534
  rectangle net "NetBUT BUZ LCD_2": 19.863,46.685 24.282,49.276
  rectangle net "NetBUT BUZ LCD_2": 18.847,46.965 20.422,52.146
  rectangle net NetRFID_7: 0.356,47.346 1.702,73.33
  rectangle net NetRFID_7: 0.686,68.097 6.96,73.609
  rectangle: 16.231,81.204 18.364,83.083
  rectangle: 19.025,81.305 20.879,82.956
  rectangle net SCL: 21.59,80.188 23.419,82.88
  rectangle net SDA: 15.824,77.724 20.447,79.807
  rectangle net SDA: 13.411,77.216 16.84,79.832
  rectangle net SDA: 13.919,76.352 21.184,77.292
  rectangle net SDA: 24.13,81.255 25.959,89.306
  rectangle net 5V: 26.772,81.255 28.473,89.51
  rectangle net 5V: 28.118,84.506 29.261,89.51
  rectangle net GND: 29.261,81.128 35.839,82.779
  rectangle: 41.402,71.577 44.704,73.508
  rectangle net 5V: 44.501,71.526 46.863,75.997
  rectangle net GND: 48.336,69.444 50.063,71.145
  rectangle net 5V: 50.825,69.52 52.68,71.323
  rectangle net 5V: 50.825,69.52 54.788,75.413
  rectangle net SCL: 48.311,66.954 50.038,68.605
  rectangle net SDA: 48.235,64.491 49.962,66.116
  rectangle net SDA: 47.803,64.694 49.962,66.091
  rectangle net SDA: 48.082,64.16 50.038,65.684
  rectangle net "NetBUT BUZ LCD_2": 48.26,61.798 49.936,63.551
  rectangle net "NetBUT BUZ LCD_1": 48.057,59.131 49.962,60.782
  rectangle net "NetBUT BUZ LCD_3": 44.018,55.55 48.057,56.947
  rectangle net "NetBUT BUZ LCD_3": 43.84,56.515 45.339,60.223
  rectangle net "NetBUT BUZ LCD_3": 44.882,56.21 46.812,58.039
  rectangle net "NetBUT BUZ LCD_3": 44.196,53.569 52.197,56.261
  rectangle net "NetBUT BUZ LCD_3": 46.025,56.007 52.273,57.912
  rectangle net GND: 38.887,51.003 42.824,53.67
  rectangle net 5V: 35.585,46.177 45.06,49.428
  rectangle net "NetBUT BUZ LCD_1": 22.555,50.698 24.74,52.706
  rectangle net "NetBUT BUZ LCD_2": 22.682,46.177 25.298,48.59
  rectangle net "NetBUT BUZ LCD_2": 22.073,46.177 25.298,48.895
  rectangle net GND: 36.297,38.303 38.887,41.453
  rectangle net GND: 13.589,35.865 17.475,37.49
  rectangle net Net1_3: 21.209,30.201 23.317,34.722
  rectangle net Net1_4: 21.285,35.916 27.61,37.44
  rectangle net NetR3_1: 5.613,38.252 8.255,42.088
  rectangle net RELAY: 50.165,42.139 52.908,44.907
  rectangle net GND: 55.956,49.174 58.369,52.045
  rectangle net "SENS 12V": 26.924,78.588 29.87,79.832
  rectangle net "SENS 12V": 27.61,77.673 29.235,79.477
  rectangle net NetR4_2: 31.115,75.133 33.096,77.826
  rectangle net NetR4_2: 31.902,75.286 34.341,77.622
  rectangle net "SENS 12V": 28.346,77.318 30.277,79.248
  rectangle net "SENS 12V": 71.857,78.308 75.184,85.242
  rectangle net "SENS 12V": 82.931,82.652 85.192,84.811
  rectangle net RELAY: 59.919,66.751 66.345,69.698
  rectangle net NetD2_1: 74.219,57.074 77.775,60.884
  rectangle net "14,5 V": 79.375,58.877 82.779,62.509
  rectangle: 73.838,46.38 78.359,50.19
  rectangle: 72.288,47.396 76.657,49.225
  rectangle net GND: 77.826,36.22 81.356,39.319
  rectangle net GND: 66.142,36.373 79.883,37.719
  rectangle net "13,8 V": 98.425,35.839 104.038,38.964
  rectangle net "13,8 V": 84.226,35.738 100.254,37.49
  rectangle net NetD2_1: 73.939,60.655 77.953,65.405
  rectangle net GND: 93.497,66.015 97.307,70.206
  rectangle net NetD5_1: 164.313,61.443 168.402,65.862
  rectangle net NetD5_1: 162.865,62.636 166.192,72.136
  rectangle net NetD7_2: 174.854,75.082 184.531,78.867
  rectangle net NetD5_2: 164.44,75.184 171.171,79.883
  rectangle net NetC5_2: 178.435,69.647 180.01,73.076
  rectangle net NetC5_2: 178.918,71.12 181.026,72.796
  rectangle net NetC5_2: 188.874,69.367 192.456,75.463
  rectangle net NetC5_2: 187.909,70.891 191.897,72.339
  rectangle net NetC5_2: 172.644,55.169 177.673,64.745
  rectangle net NetC5_2: 175.946,57.404 178.283,65.684
  rectangle net GND: 181.026,41.173 187.02,49.733
  rectangle net GND: 186.182,41.91 193.472,47.168
  rectangle net NetC5_2: 166.37,39.497 175.489,44.679
  rectangle net GND: 142.316,53.899 146.914,73.99
  rectangle net GND: 141.757,41.986 146.177,56.566
  rectangle net 5V: 66.345,73.152 70.104,75.743
  rectangle net 5V: 77.394,75.743 80.061,78.969
  rectangle net 5V: 75.184,76.098 78.232,77.394
  rectangle net GND: 85.42,74.092 93.269,76.937
  rectangle net GND: 94.082,78.054 97.307,82.931
  rectangle net GND: 96.114,77.953 98.323,82.829
  rectangle net GND: 54.635,40.615 60.35,46.609
  rectangle net 5V: 103.581,79.426 106.07,82.017
  rectangle net "14,5 V": 103.683,74.092 105.791,75.565
  rectangle net "13,8 V": 87.909,48.26 94.996,53.696
  rectangle net NetD5_1: 154.178,76.302 156.134,78.003
  rectangle net GND: 161.671,35.458 163.601,39.218
  rectangle net GND: 103.683,76.327 105.435,78.359
  rectangle net GND: 81.966,73.025 84.684,75.794
  rectangle net NetQ2_2: 87.528,69.342 89.56,71.831
  rectangle net NetQ2_2: 74.854,67.361 77.775,69.698
  rectangle net NetD2_1: 82.296,65.405 84.455,67.869
  rectangle net NetCERRADURA1_1: 43.434,32.41 45.212,34.061
  rectangle net GND: 27.94,11.532 30.709,16.053
  rectangle net GND: 13.005,14.326 18.948,17.526
  rectangle net Net1_3: 23.089,15.494 25.578,17.704
  rectangle: 12.497,33.274 15.164,35.077
  rectangle: 20.93,38.456 23.546,40.462
  rectangle net GND: 16.637,37.008 17.475,42.189
  rectangle net GND: 17.018,38.125 18.39,42.139
  rectangle net GND: 17.983,38.684 19.507,42.215
  rectangle net GND: 18.263,41.961 21.209,42.088
  rectangle net GND: 18.999,41.123 20.193,42.037
  rectangle net RELAY: 29.921,42.316 33.706,46.101
  rectangle: 15.773,48.438 17.704,50.292
  rectangle: 16.002,51.029 17.526,52.832
  rectangle: 13.284,48.489 15.113,50.165
  rectangle: 10.795,48.641 12.624,50.241
  rectangle: 8.306,48.362 10.135,50.19
  rectangle: 5.944,51.079 7.341,52.883
  rectangle: 8.306,51.206 9.906,52.781
  rectangle: 10.744,51.181 12.446,52.959
  rectangle: 13.36,51.079 15.062,52.959
  rectangle net 5V: 35.484,50.419 37.44,52.553
  rectangle net "NetBUT BUZ LCD_2": 51.029,61.722 52.553,63.373
  rectangle net "NetBUT BUZ LCD_3": 50.902,64.491 52.426,66.065
  rectangle: 50.851,67.081 52.73,68.504
  rectangle net "NetBUT BUZ LCD_3": 50.749,56.566 52.603,60.757
  rectangle net SDA: 6.706,76.657 14.91,89.154
  rectangle net SDA: 0.254,76.479 14.046,83.769
  rectangle net GND: 17.45,34.214 19.177,39.04
  rectangle net NetR4_2: 56.286,62.865 61.417,65.075

## Text inside footprints (layer, text, board x,y; h text height)
"BUT BUZ LCD": Top Overlay "1" at 52.197,57.531 h1.27 r90; Top Overlay "5" at 52.197,71.755 h1.27 r90; Top Overlay "10" at 49.657,71.755 h1.27 r90; Top Overlay "6" at 49.657,57.531 h1.27 r90
C4: Top Overlay "+" at 161.538,41.357 h1.52 r90
C6: Top Overlay "+" at 173.601,40.629 h1.52 r180
RFID: Top Overlay "1" at 4.064,48.895 h1.27; Top Overlay "5" at 18.288,48.895 h1.27; Top Overlay "10" at 18.288,51.435 h1.27; Top Overlay "6" at 4.064,51.435 h1.27